# Altium PCB clock_led.PcbDoc (part 1 of 3)
Units mm, origin at the board's own origin, x right, y up, seen from the top; angles counter-clockwise.
Board outline 60 x 80 mm, 4 copper layers (TL, L2, L3, BL), stack 1.564 mm thick; 321 components, 72 nets, 902 pads, 698 vias.
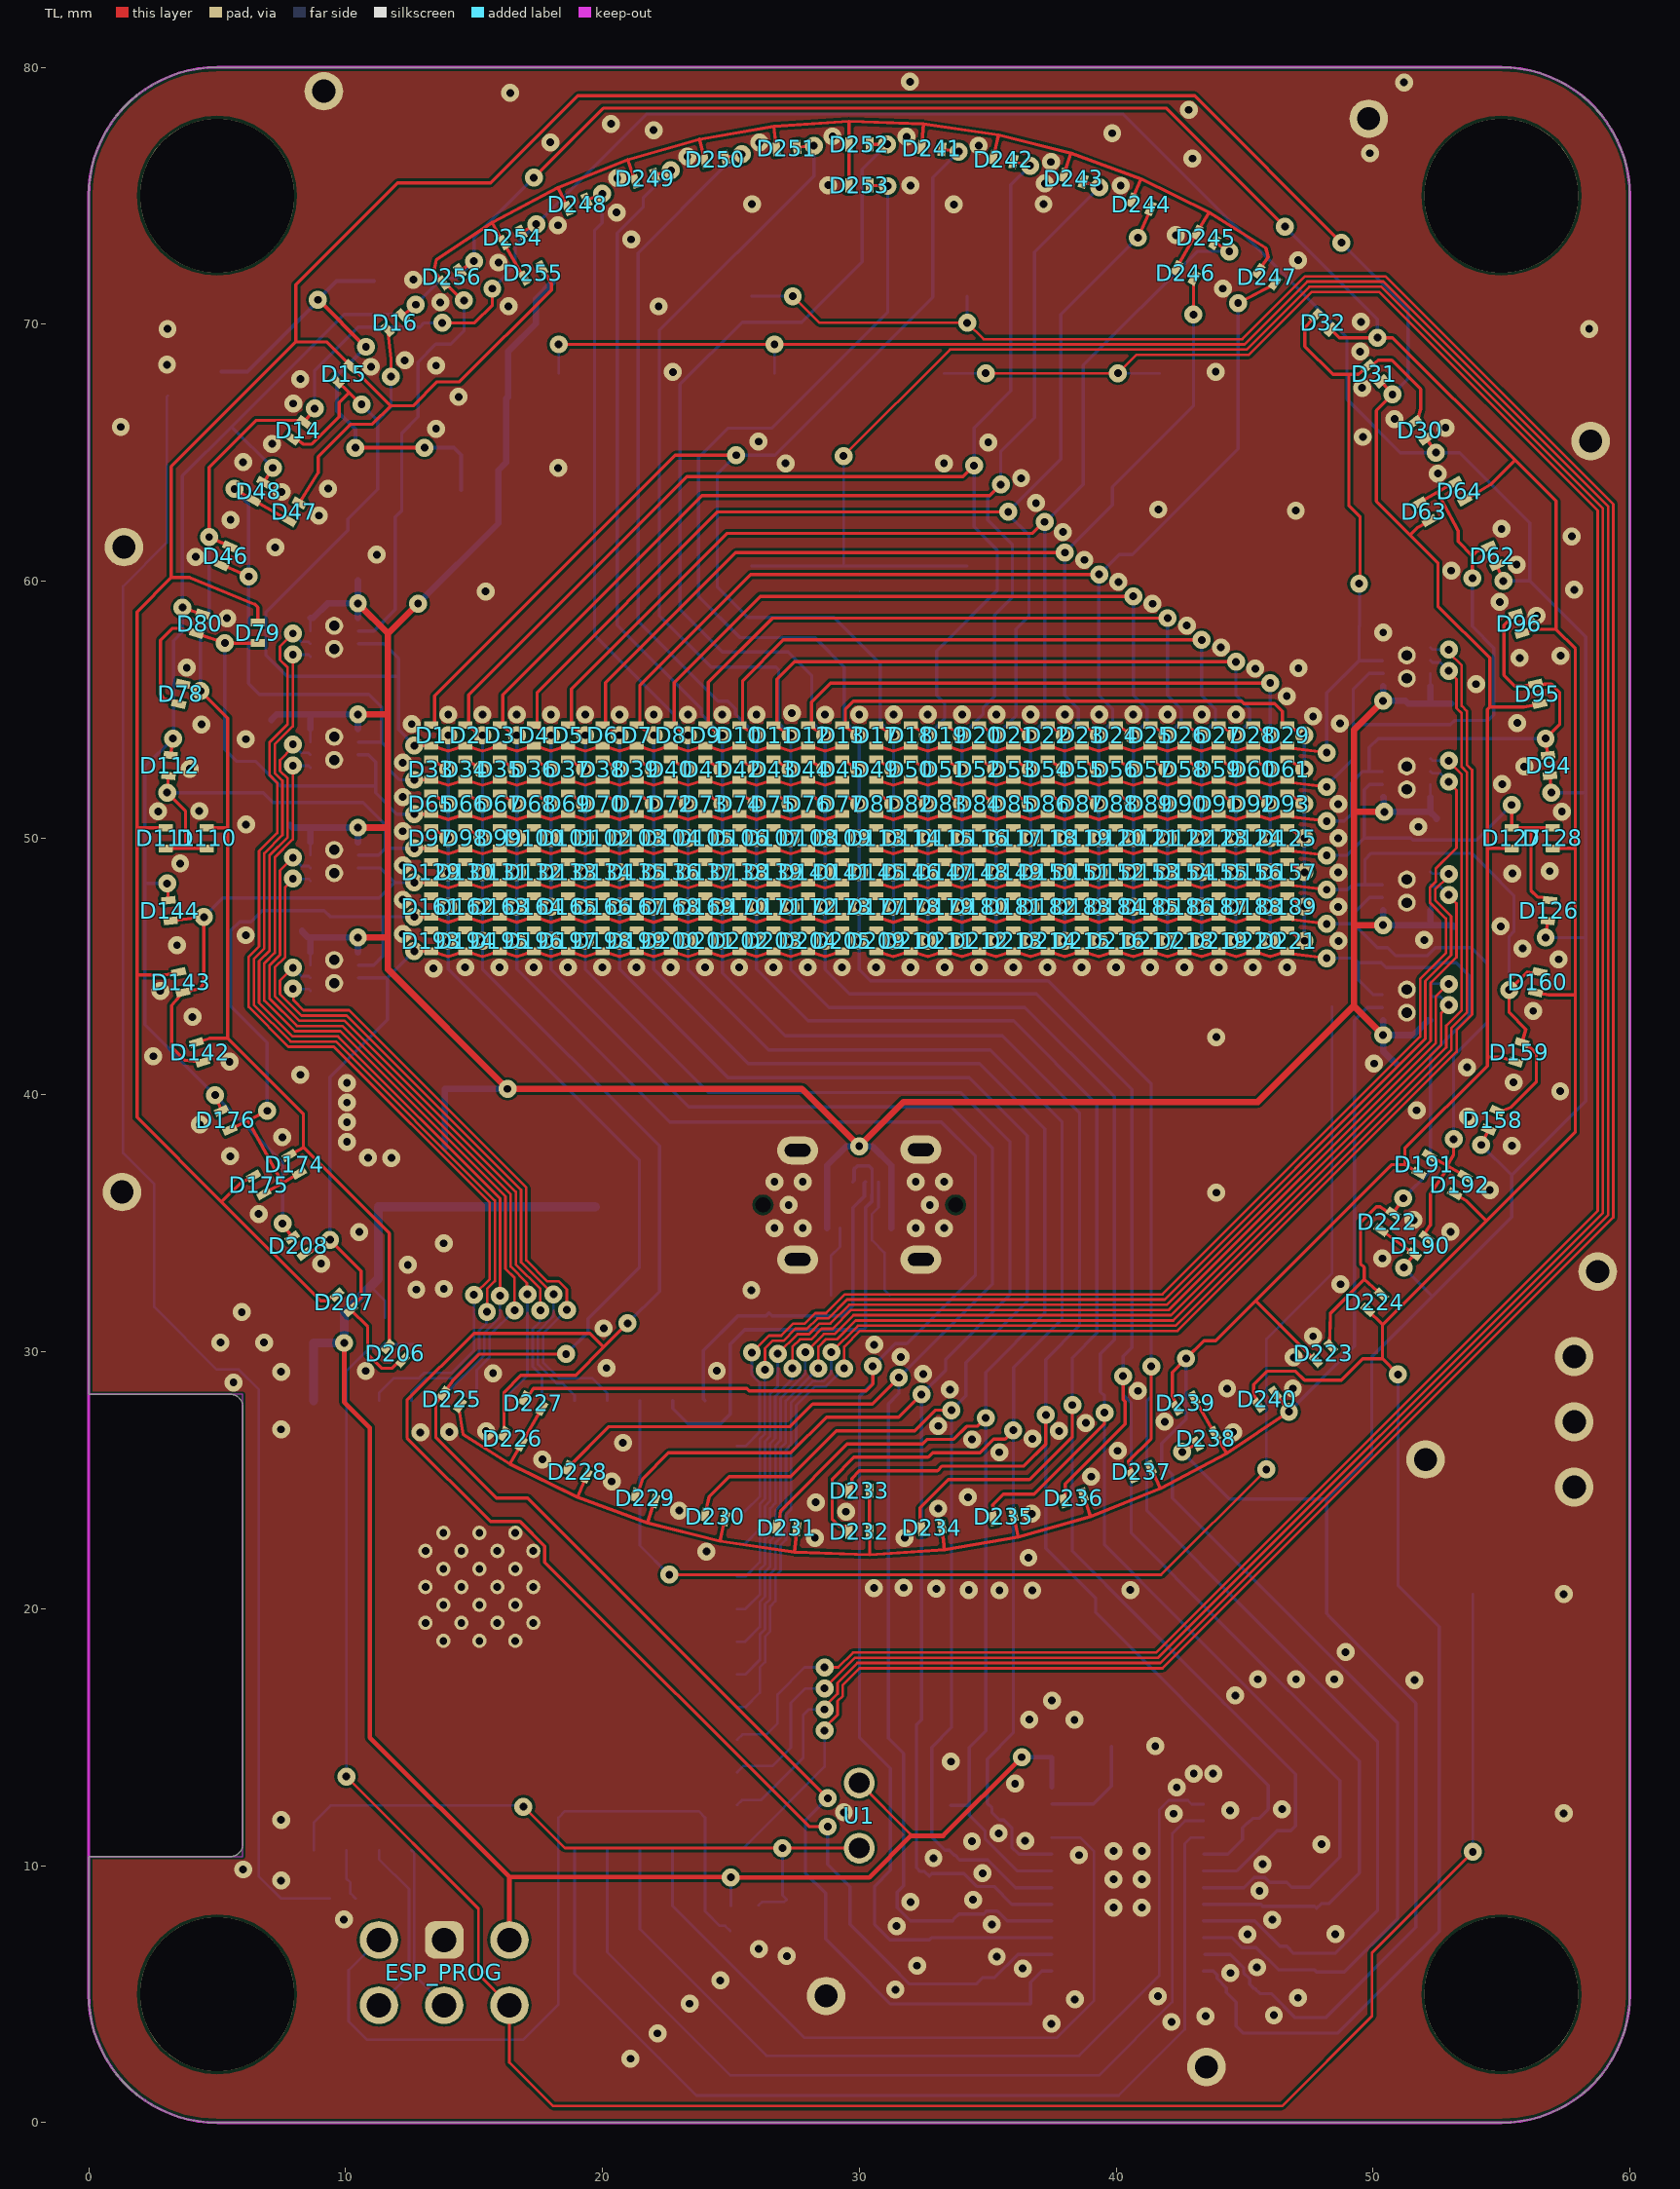
[diagram p0: TL view]
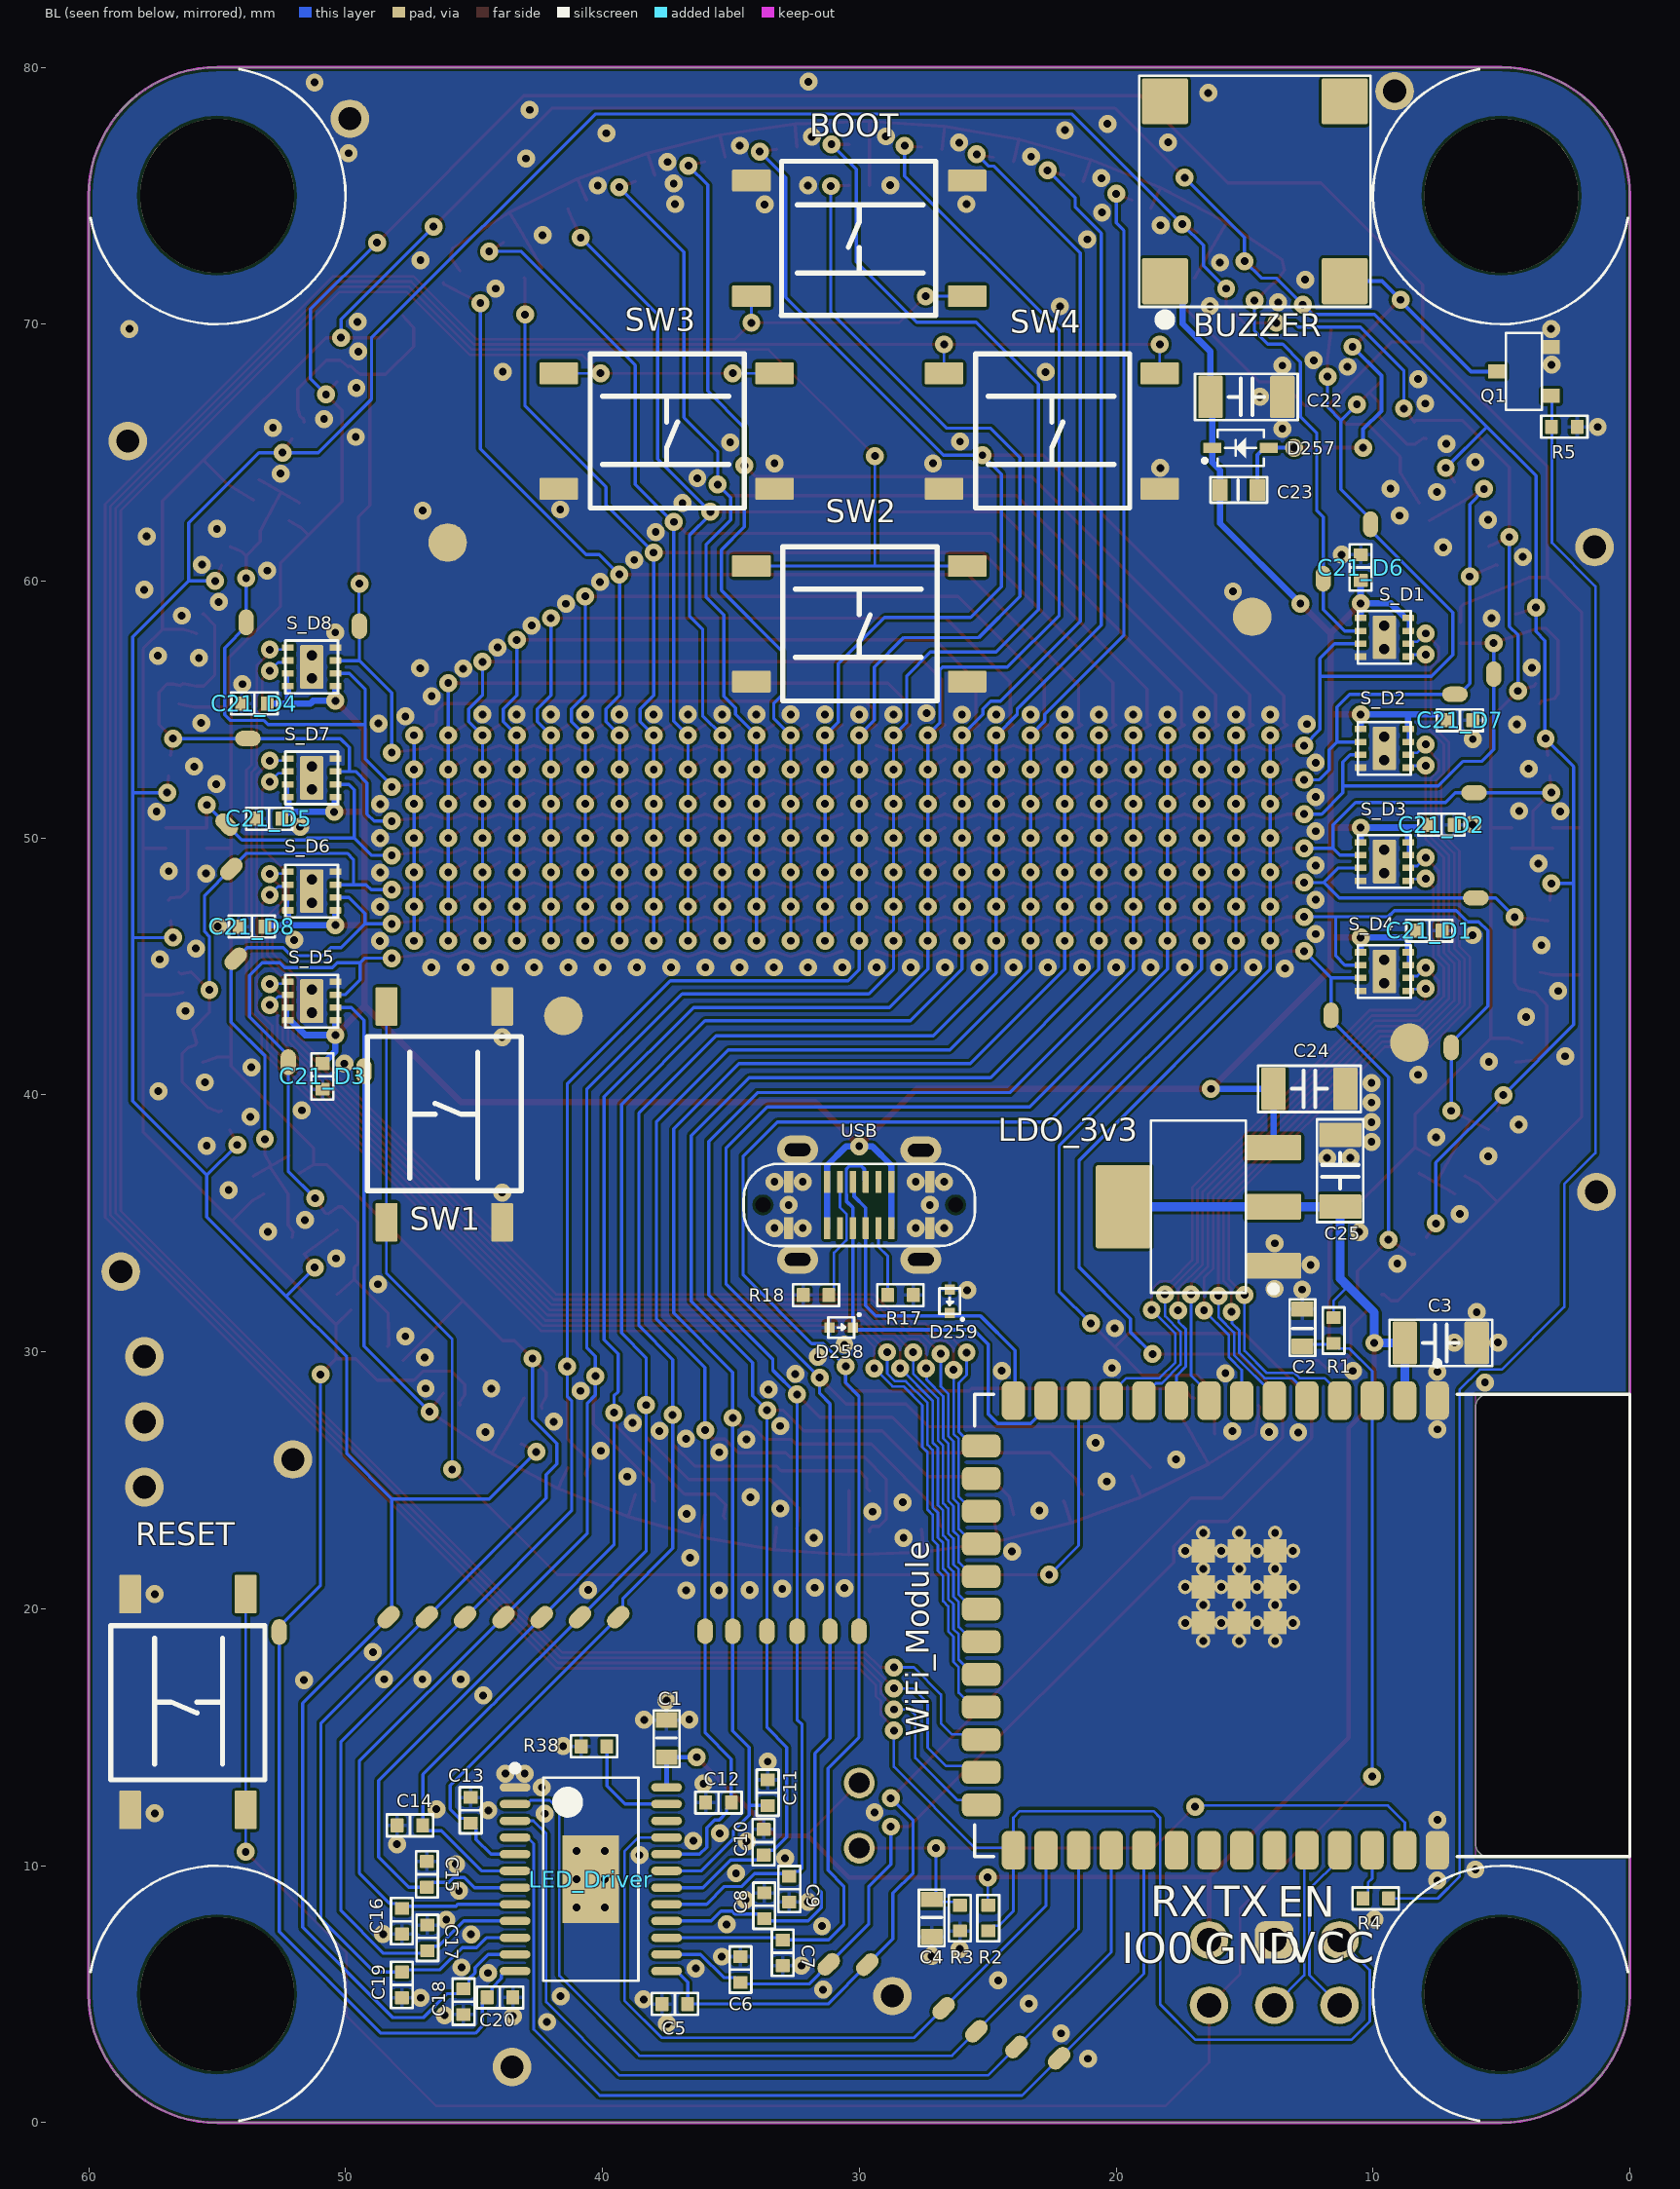
[diagram p1: BL view, seen from below]
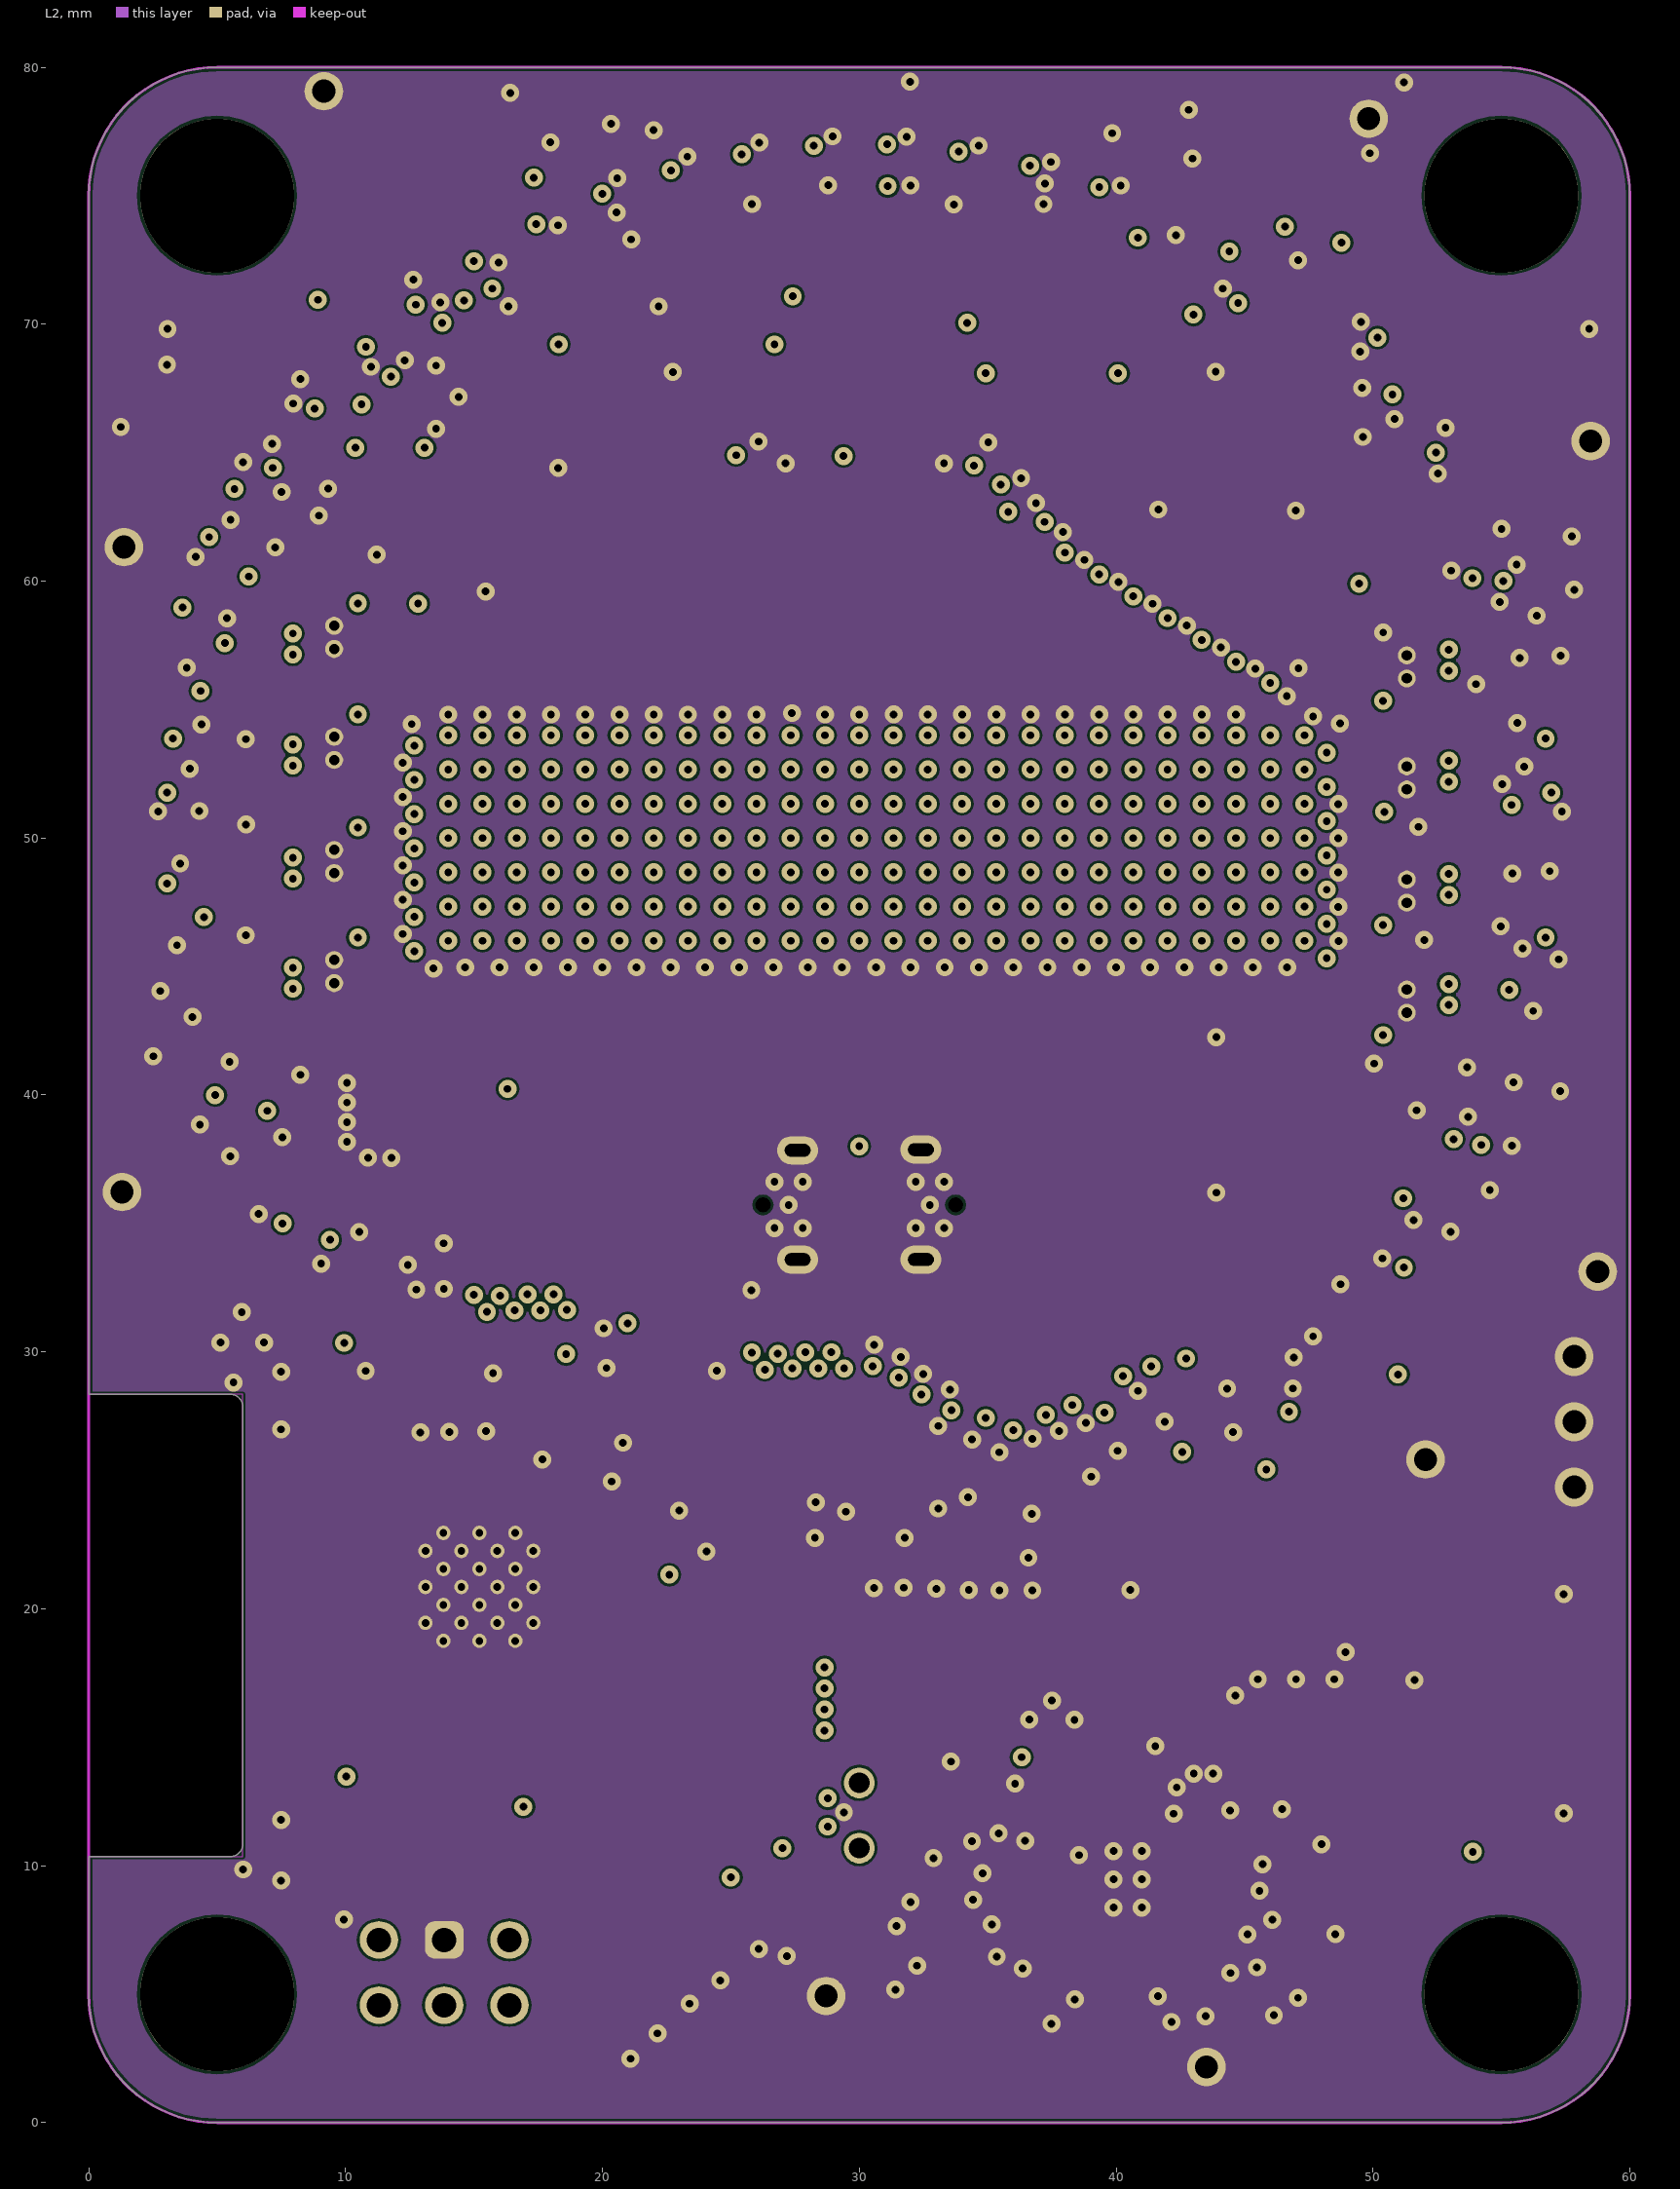
[diagram p2: L2]
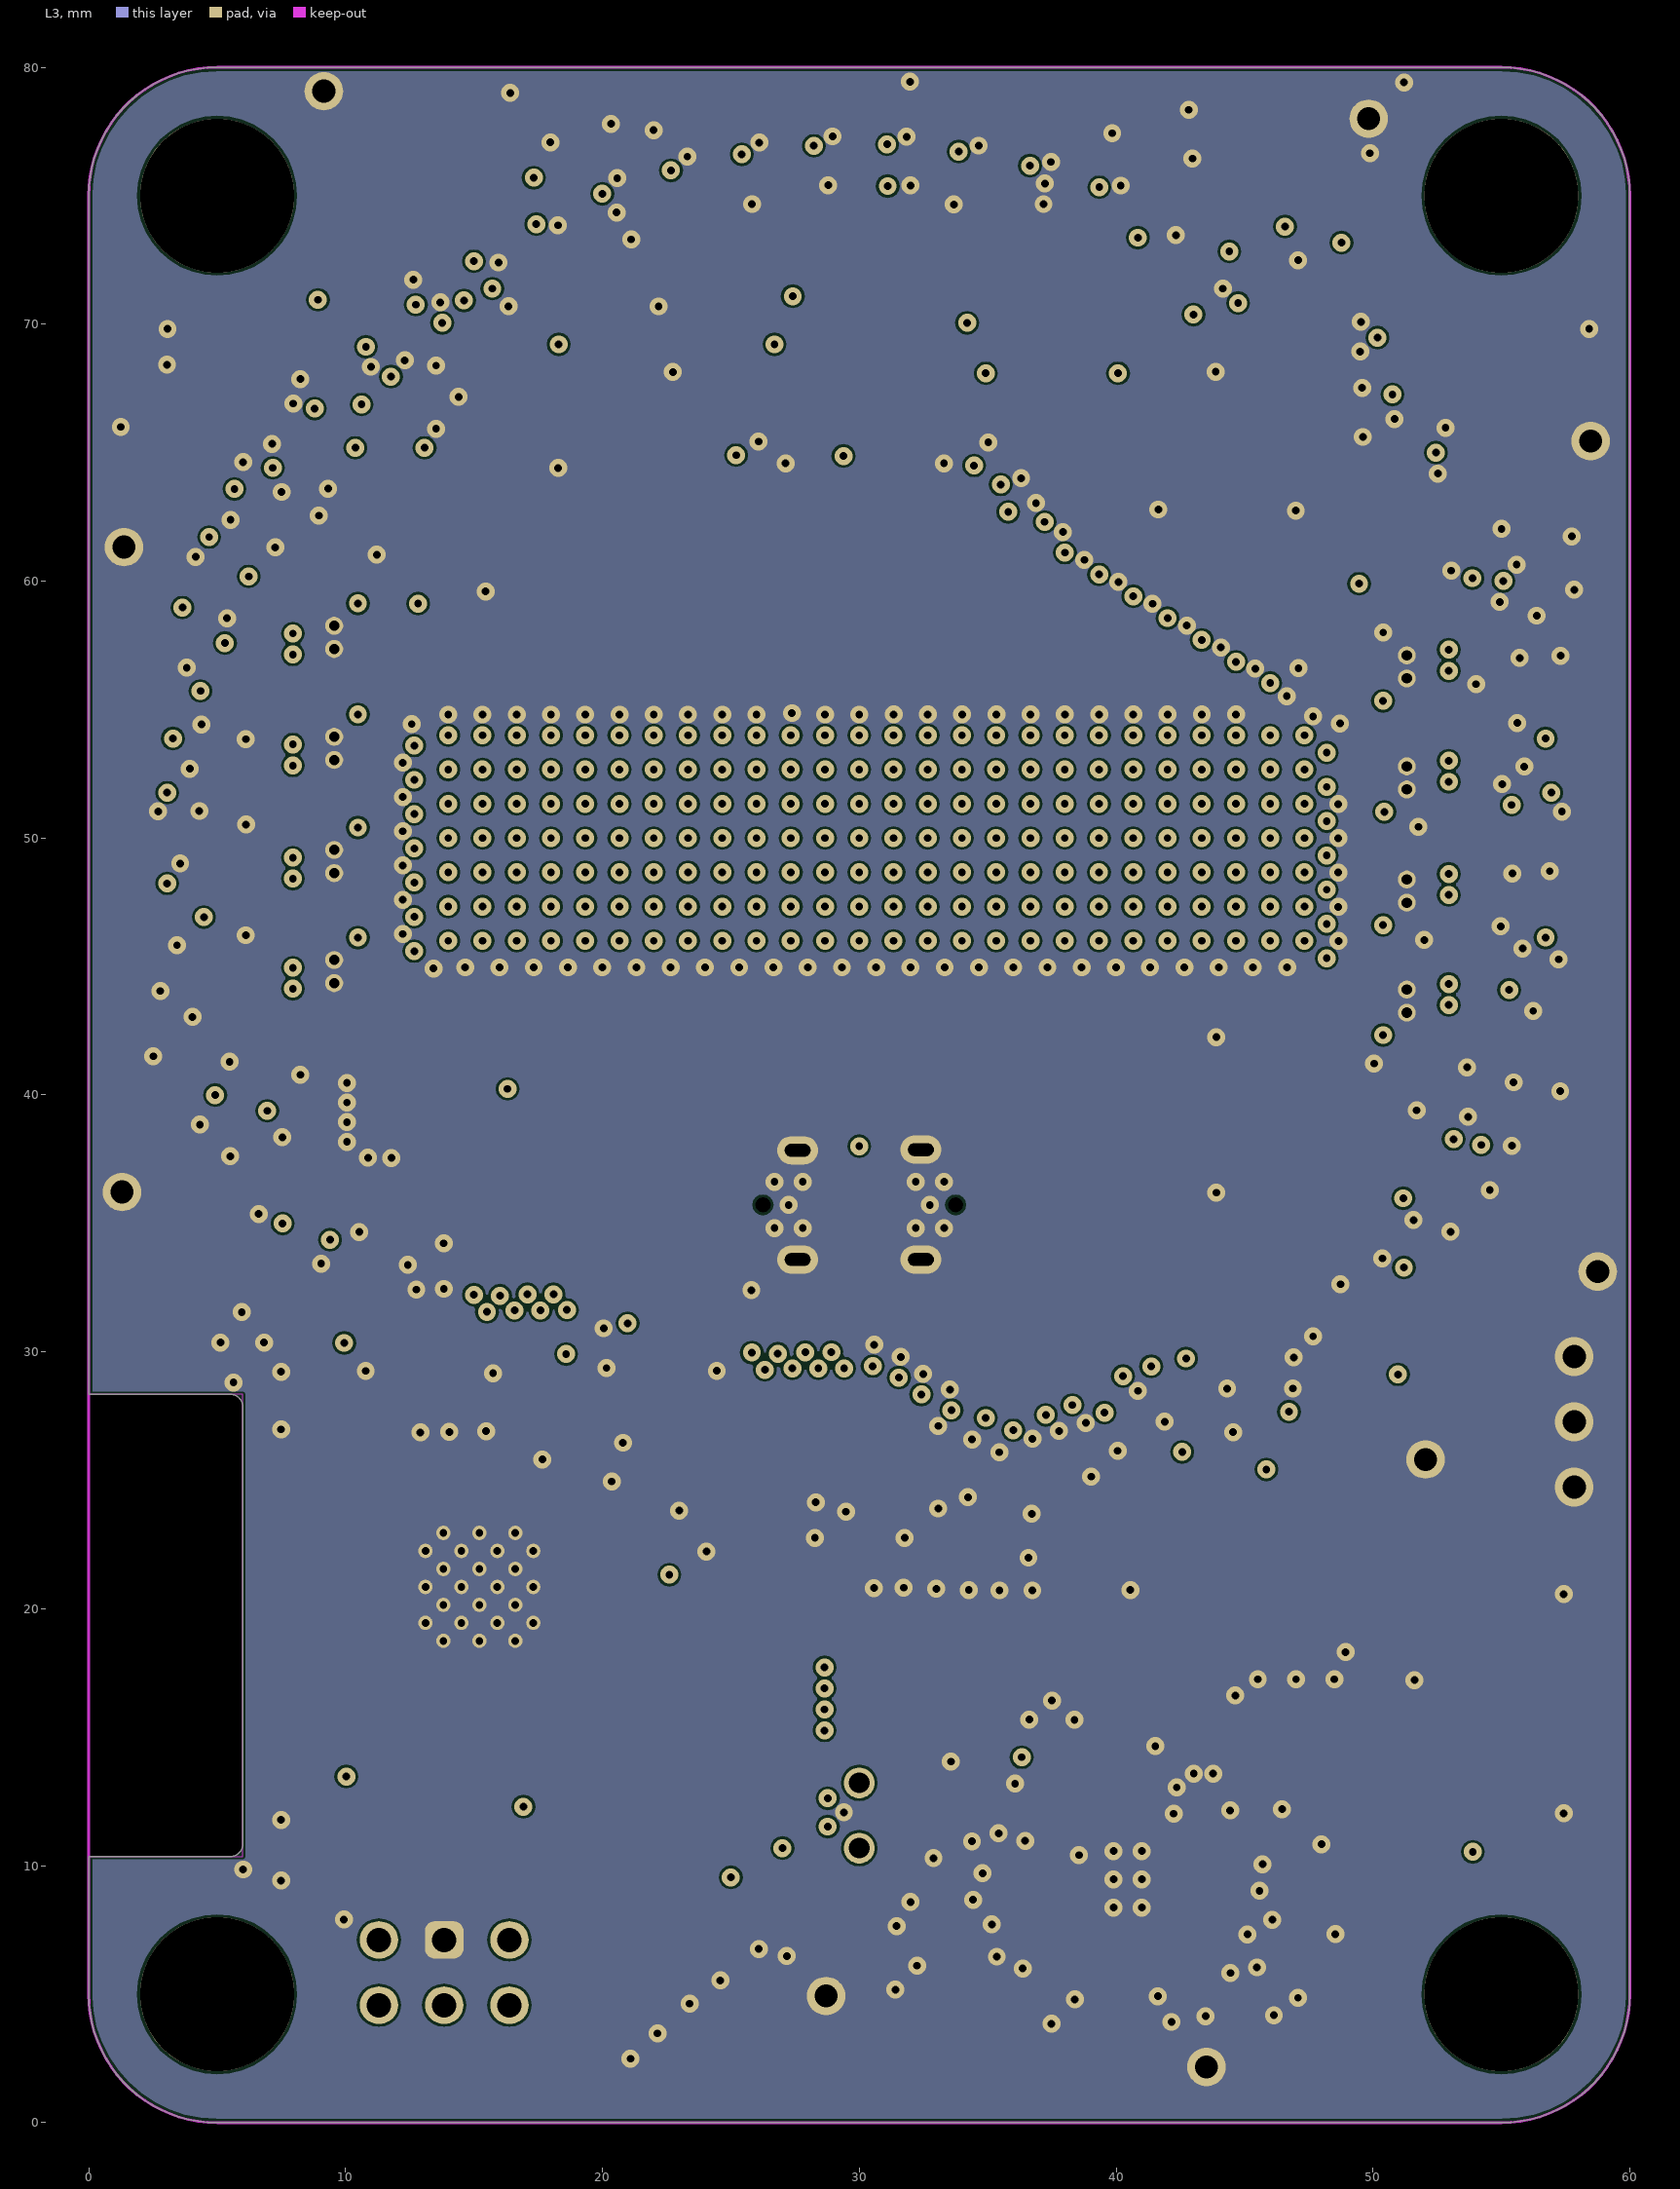
[diagram p3: L3]

## Layer stack, top to bottom
Top Solder: solder mask 0.0254, SM-001, Dk 4
TL: signal copper 0.035
Dielectric 1: prepreg 0.0994, PP-006, Dk 4.1
L2: signal copper 0.0152
Dielectric 2: core 1.265, Core-043, Dk 4.3
L3: signal copper 0.0152
Dielectric 3: prepreg 0.0994, PP-006, Dk 4.1
BL: signal copper 0.035
Bottom Solder: solder mask 0.0254, SM-001, Dk 4

## Board outline
0.001,5 0.001,10.355 5.502,10.355 ccw(c5.502,10.855) 6.002,10.855 6.001,10.854 6.001,27.855 ccw(c5.501,27.855) 5.501,28.355 0,28.355 0,75 cw(c5,75) 5,80 55,80 cw(c55,75) 60,75 60,5 cw(c55,5) 55,0 5,0.001 cw(c5,5)

## Design rules (kind name [scope] priority, off if disabled: settings)
Clearance Clearance_K [InNetClass('CATHODES') vs InNetClass('CATHODES')] p1: gap=0.102 ignorepadtopadclearanceinfootprint=FALSE except(0.395: Text-Hole)
Clearance [All] p2: gap=0.102 ignorepadtopadclearanceinfootprint=FALSE except(0.076: Arc-SMDPad Track-SMDPad)
ComponentClearance [All] p1: gap=0.125 collisioncheckmode=3 verticalgap=0.254 showdistances=TRUE
HoleSize [All] p1: absolutevalues=TRUE maxlimit=6 minlimit=0.025 maxpercent=80.000 minpercent=20.000
MinimumSolderMaskSliver [All] p1: minsoldermaskwidth=0.1
PolygonConnect PolygonConnect_Normal_1 [InNet('GND') vs HasFootprint('CAP_0402') OR HasFootprint('RES 0402_1005 RF') OR HasFootprint('CAPC_0603_1608X08L') OR HasFootprint('TVS_DIODE')] p1: connectstyle=Relief reliefconductorwidth=0.152 reliefentries=4 polygonreliefangle="90 Angle" airgapwidth=0.102
PolygonConnect PolygonConnect_GND [All] p2: connectstyle=Direct reliefconductorwidth=0.254 reliefentries=4 polygonreliefangle="90 Angle" airgapwidth=0.254
PolygonConnect PolygonConnect_Normal [All] p3: connectstyle=Relief reliefconductorwidth=0.254 reliefentries=4 polygonreliefangle="90 Angle" airgapwidth=0.254
RoutingVias [All] p1: holewidth=0.711 width=1.27 viastyle="Through Hole" minholewidth=0.711 minwidth=1.27 maxholewidth=0.711 maxwidth=1.27 useviatemplates=TRUE viatemplateguid#1={105B9890-E4DB-4CED-86C6-94DD6AE4ED00} viatemplateguid#2={BDFD0E13-A248-40EC-85C0-868C4552AEFA} viatemplateguid#3={A392A9DB-8C15-4CF2-995A-6831BDE9E32C} viatemplateguid#4={B74F54F6-0500-4321-A5F9-6BF2CA40FEDF} viatemplateguid#5={693162FA-0B77-47D4-AF39-BF49E954BDF3} viatemplatename#1=GND_VIA viatemplatename#2=LED_ROUTING viatemplatename#3=SW_ROUTING viatemplatename#4=S_ROUTING viatemplatename#5=TH_TEST_VIA
SilkToSilkClearance [All] p1: silktosilkclearance=0
SilkToSolderMaskClearance [False] p1: minsilkscreentomaskgap=0 clearancetoexposedcopper=TRUE
SolderMaskExpansion [All] p1: expansion=0.038 istentingtop=FALSE
SupplyNets "Schematic Supply Nets_2" [InNet('VCC')] p1: voltage=0.000
SupplyNets "Schematic Supply Nets_1" [InNet('+5')] p2: voltage=0.000
SupplyNets "Schematic Supply Nets" [InNet('GND')] p3: voltage=0.000
Width [All] p1: maxlimit=1 minlimit=0.076 preferedwidth=0.102 minimp=50.000000 maximp=50.000000 favimp=50.000000
25 further rules are at their usual default settings.

## Classes and differential pairs
net class N000-1_[0..15]: K0 K1 K2 K3 K4 K5 K6 K7 K8 K9 K10 K11 K12 K13 K14 K15
net class CATHODES: K0 K1 K2 K3 K4 K5 K6 K7 K8 K9 K10 K11 K12 K13 K14 K15
channel class clock_led_dual_switch: D1 D2 D3 D4 D5 D6 D7 D8
component class D1: C21_D1 S_D1
component class D2: C21_D2 S_D2
component class D3: C21_D3 S_D3
component class D4: C21_D4 S_D4
component class D5: C21_D5 S_D5
component class D6: C21_D6 S_D6
component class D7: C21_D7 S_D7
component class D8: C21_D8 S_D8
component class LED_MATRIX: D1 D2 D3 D4 D5 D6 D7 D8 D9 D10 D11 D12 D13 D17 D18 D19 D20 D21 D22 D23 D24 D25 D26 D27 D28 D29 D33 D34 D35 D36 D37 D38 D39 D40 D41 D42 D43 D44 D45 D49 D50 D51 D52 D53 D54 D55 D56 D57 D58 D59 D60 D61 D65 D66 D67 D68 D69 D70 D71 D72 D73 D74 D75 D76 D77 D81 D82 D83 D84 D85 D86 D87 D88 D89 D90 D91 D92 D93 D97 D98 D99 D100 D101 D102 D103 D104 D105 D106 D107 D108 D109 D113 D114 D115 D116 D117 D118 D119 D120 D121 D122 D123 D124 D125 D129 D130 D131 D132 D133 D134 D135 D136 D137 D138 D139 D140 D141 D145 D146 D147 D148 D149 D150 D151 D152 D153 D154 D155 D156 D157 D161 D162 D163 D164 D165 D166 D167 D168 D169 D170 D171 D172 D173 D177 D178 D179 D180 D181 D182 D183 D184 D185 D186 D187 D188 D189 D193 D194 D195 D196 D197 D198 D199 D200 D201 D202 D203 D204 D205 D209 D210 D211 D212 D213 D214 D215 D216 D217 D218 D219 D220 D221
component class clock_led: BOOT BUZZER C1 C2 C3 C4 C5 C6 C7 C8 C9 C10 C11 C12 C13 C14 C15 C16 C17 C18 C19 C20 C22 C23 C24 C25 D257 D258 D259 ESP_PROG LDO_3v3 LED_Driver Q1 R1 R2 R3 R4 R5 R17 R18 R38 RESET SW1 SW2 SW3 SW4 U1 USB WiFi_Module
net class N000-2_[0..15]: A0 A1 A2 A3 A4 A5 A6 A7 A8 A9 A10 A11 A12 A13 A14 A15
component class "CLOCK FACE": CONNECTOR D1 D2 D3 D4 D5 D6 D7 D8 D9 D10 D11 D12 D13 D14 D15 D16 D17 D18 D19 D20 D21 D22 D23 D24 D25 D26 D27 D28 D29 D30 D31 D32 D33 D34 D35 D36 D37 D38 D39 D40 D41 D42 D43 D44 D45 D46 D47 D48 D49 D50 D51 D52 D53 D54 D55 D56 D57 D58 D59 D60 D61 D62 D63 D64 D65 D66 D67 D68 D69 D70 D71 D72 D73 D74 D75 D76 D77 D78 D79 D80 D81 D82 D83 D84 D85 D86 D87 D88 D89 D90 D91 D92 D93 D94 D95 D96 D97 D98 D99 D100 D101 D102 D103 D104 D105 D106 D107 D108 D109 D110 D111 D112 D113 D114 D115 D116 D117 D118 D119 D120 D121 D122 D123 D124 D125 D126 D127 D128 D129 D130 D131 D132 D133 D134 D135 D136 D137 D138 D139 D140 D141 D142 D143 D144 D145 D146 D147 D148 D149 D150 D151 D152 D153 D154 D155 D156 D157 D158 D159 D160 D161 D162 D163 D164 D165 D166 D167 D168 D169 D170 D171 D172 D173 D174 D175 D176 D177 D178 D179 D180 D181 D182 D183 D184 D185 D186 D187 D188 D189 D190 D191 D192 D193 D194 D195 D196 D197 D198 D199 D200 D201 D202 D203 D204 D205 D206 D207 D208 D209 D210 D211 D212 D213 D214 D215 D216 D217 D218 D219 D220 D221 D222 D223 D224 D225 D226 D227 D228 D229 D230 D231 D232 D233 D234 D235 D236 D237 D238 D239 D240 D241 D242 D243 D244 D245 D246 D247 D248 D249 D250 D251 D252 D253 D254 D255 D256

## Components (designator, comment, footprint, x,y, rotation, side; value= is the part's Value field where it differs from the comment)
BOOT "SW-SMD_YZA-072-7.0" FSM-SWITCH-6X6X7.0 30,73.34 r0 bottom
BUZZER "BUZZER_MLT-7525" BUZZER_XHXDZ_SMD8530 14.6,75.175 r270 bottom
C1 "100nF" CAPC_0603_1608X08L 37.5,14.95 r270 bottom
C2 "100nF" CAPC_0603_1608X08L 12.744,30.943 r90 bottom
C3 "1uF" CAPC_1206_3216X16L 7.361,30.35 r180 bottom
C4 "100nF" CAPC_0603_1608X08L 27.178,7.965 r270 bottom
C5 "100pF" CAP_0402 37.178,4.623 r180 bottom
C6 "100pF" CAP_0402 34.624,5.963 r270 bottom
C7 "100pF" CAP_0402 32.979,6.613 r90 bottom
C8 "100pF" CAP_0402 33.7,8.444 r270 bottom
C9 "100pF" CAP_0402 32.725,9.092 r90 bottom
C10 "100pF" CAP_0402 33.725,10.917 r270 bottom
C11 "100pF" CAP_0402 33.563,12.845 r270 bottom
C12 "100pF" CAP_0402 35.481,12.459 r180 bottom
C13 "100pF" CAP_0402 45.129,12.16 r270 bottom
C14 "100pF" CAP_0402 47.491,11.573 r180 bottom
C15 "100pF" CAP_0402 46.831,9.667 r270 bottom
C16 "100pF" CAP_0402 47.806,7.842 r90 bottom
C17 "100pF" CAP_0402 46.813,7.194 r270 bottom
C18 "100pF" CAP_0402 45.407,4.709 r90 bottom
C19 "100pF" CAP_0402 47.806,5.363 r90 bottom
C20 "100pF" CAP_0402 43.987,4.877 r0 bottom
C21_D1 "100nF" CAP_0402 7.804,46.395 r180 bottom (schematic designator C21)
C21_D2 "100nF" CAP_0402 7.331,50.519 r180 bottom (schematic designator C21)
C21_D3 "100nF" CAP_0402 50.901,40.724 r270 bottom (schematic designator C21)
C21_D4 "100nF" CAP_0402 53.544,55.239 r0 bottom (schematic designator C21)
C21_D5 "100nF" CAP_0402 52.974,50.75 r0 bottom (schematic designator C21)
C21_D6 "100nF" CAP_0402 10.482,60.528 r90 bottom (schematic designator C21)
C21_D7 "100nF" CAP_0402 6.612,54.585 r180 bottom (schematic designator C21)
C21_D8 "100nF" CAP_0402 53.645,46.558 r0 bottom (schematic designator C21)
C22 "1uF" CAPC_1206_3216X16L 14.926,67.168 r180 bottom
C23 "100nF" CAPC_0603_1608X08L 15.225,63.55 r180 bottom
C24 "1uF" CAPC_1206_3216X16L 12.471,40.238 r0 bottom
C25 "1uF" CAPC_1206_3216X16L 11.276,37.051 r90 bottom
D1 "LED" LED_0402 13.334,54 r270 top
D2 "LED" LED_0402 14.667,54 r270 top
D3 "LED" LED_0402 16,54 r270 top
D4 "LED" LED_0402 17.334,54 r270 top
D5 "LED" LED_0402 18.667,54 r270 top
D6 "LED" LED_0402 20,54 r270 top
D7 "LED" LED_0402 21.334,54 r270 top
D8 "LED" LED_0402 22.667,54 r270 top
D9 "LED" LED_0402 24,54 r270 top
D10 "LED" LED_0402 25.333,54 r270 top
D11 "LED" LED_0402 26.667,54 r270 top
D12 "LED" LED_0402 28,54 r270 top
D13 "LED" LED_0402 29.333,54 r270 top
D14 "LED" LED_0402 8.157,65.87 r234 top
D15 "LED" LED_0402 9.935,68.067 r228 top
D16 "LED" LED_0402 11.933,70.065 r222 top
D17 "LED" LED_0402 30.667,54 r270 top
D18 "LED" LED_0402 32,54 r270 top
D19 "LED" LED_0402 33.333,54 r270 top
D20 "LED" LED_0402 34.667,54 r270 top
D21 "LED" LED_0402 36,54 r270 top
D22 "LED" LED_0402 37.333,54 r270 top
D23 "LED" LED_0402 38.666,54 r270 top
D24 "LED" LED_0402 40,54 r270 top
D25 "LED" LED_0402 41.333,54 r270 top
D26 "LED" LED_0402 42.666,54 r270 top
D27 "LED" LED_0402 44,54 r270 top
D28 "LED" LED_0402 45.333,54 r270 top
D29 "LED" LED_0402 46.666,54 r270 top
D30 "LED" LED_0402 51.843,65.87 r126 top
D31 "LED" LED_0402 50.065,68.067 r132 top
D32 "LED" LED_0402 48.067,70.065 r138 top
D33 "LED" LED_0402 13.334,52.667 r270 top
D34 "LED" LED_0402 14.667,52.667 r270 top
D35 "LED" LED_0402 16,52.667 r270 top
D36 "LED" LED_0402 17.334,52.667 r270 top
D37 "LED" LED_0402 18.667,52.667 r270 top
D38 "LED" LED_0402 20,52.667 r270 top
D39 "LED" LED_0402 21.334,52.667 r270 top
D40 "LED" LED_0402 22.667,52.667 r270 top
D41 "LED" LED_0402 24,52.667 r270 top
D42 "LED" LED_0402 25.333,52.667 r270 top
D43 "LED" LED_0402 26.667,52.667 r270 top
D44 "LED" LED_0402 28,52.667 r270 top
D45 "LED" LED_0402 29.333,52.667 r270 top
D46 "LED" LED_0402 5.334,60.982 r246 top
D47 "LED" LED_0402 8.003,62.7 r240 top
D48 "LED" LED_0402 6.617,63.5 r240 top
D49 "LED" LED_0402 30.667,52.667 r270 top
D50 "LED" LED_0402 32,52.667 r270 top
D51 "LED" LED_0402 33.333,52.667 r270 top
D52 "LED" LED_0402 34.667,52.667 r270 top
D53 "LED" LED_0402 36,52.667 r270 top
D54 "LED" LED_0402 37.333,52.667 r270 top
D55 "LED" LED_0402 38.666,52.667 r270 top
D56 "LED" LED_0402 40,52.667 r270 top
D57 "LED" LED_0402 41.333,52.667 r270 top
D58 "LED" LED_0402 42.666,52.667 r270 top
D59 "LED" LED_0402 44,52.667 r270 top
D60 "LED" LED_0402 45.333,52.667 r270 top
D61 "LED" LED_0402 46.666,52.667 r270 top
D62 "LED" LED_0402 54.666,60.982 r114 top
D63 "LED" LED_0402 51.997,62.7 r120 top
D64 "LED" LED_0402 53.383,63.5 r120 top
D65 "LED" LED_0402 13.334,51.333 r270 top
D66 "LED" LED_0402 14.667,51.333 r270 top
D67 "LED" LED_0402 16,51.333 r270 top
D68 "LED" LED_0402 17.334,51.333 r270 top
D69 "LED" LED_0402 18.667,51.333 r270 top
D70 "LED" LED_0402 20,51.333 r270 top
D71 "LED" LED_0402 21.334,51.333 r270 top
D72 "LED" LED_0402 22.667,51.333 r270 top
D73 "LED" LED_0402 24,51.333 r270 top
D74 "LED" LED_0402 25.333,51.333 r270 top
D75 "LED" LED_0402 26.667,51.333 r270 top
D76 "LED" LED_0402 28,51.333 r270 top
D77 "LED" LED_0402 29.333,51.333 r270 top
D78 "LED" LED_0402 3.59,55.614 r258 top
D79 "LED" LED_0402 6.589,57.99 r270 top
D80 "LED" LED_0402 4.321,58.343 r252 top
D81 "LED" LED_0402 30.667,51.333 r270 top
D82 "LED" LED_0402 32,51.333 r270 top
D83 "LED" LED_0402 33.333,51.333 r270 top
D84 "LED" LED_0402 34.667,51.333 r270 top
D85 "LED" LED_0402 36,51.333 r270 top
D86 "LED" LED_0402 37.333,51.333 r270 top
D87 "LED" LED_0402 38.666,51.333 r270 top
D88 "LED" LED_0402 40,51.333 r270 top
D89 "LED" LED_0402 41.333,51.333 r270 top
D90 "LED" LED_0402 42.666,51.333 r270 top
D91 "LED" LED_0402 44,51.333 r270 top
D92 "LED" LED_0402 45.333,51.333 r270 top
D93 "LED" LED_0402 46.666,51.333 r270 top
D94 "LED" LED_0402 56.852,52.822 r96 top
D95 "LED" LED_0402 56.41,55.614 r102 top
D96 "LED" LED_0402 55.679,58.343 r108 top
D97 "LED" LED_0402 13.334,50 r270 top
D98 "LED" LED_0402 14.667,50 r270 top
D99 "LED" LED_0402 16,50 r270 top
D100 "LED" LED_0402 17.334,50 r270 top
D101 "LED" LED_0402 18.667,50 r270 top
D102 "LED" LED_0402 20,50 r270 top
D103 "LED" LED_0402 21.334,50 r270 top
D104 "LED" LED_0402 22.667,50 r270 top
D105 "LED" LED_0402 24,50 r270 top
D106 "LED" LED_0402 25.333,50 r270 top
D107 "LED" LED_0402 26.667,50 r270 top
D108 "LED" LED_0402 28,50 r270 top
D109 "LED" LED_0402 29.333,50 r270 top
D110 "LED" LED_0402 4.6,50 r270 top
D111 "LED" LED_0402 3,50 r270 top
D112 "LED" LED_0402 3.148,52.822 r264 top
D113 "LED" LED_0402 30.667,50 r270 top
D114 "LED" LED_0402 32,50 r270 top
D115 "LED" LED_0402 33.333,50 r270 top
D116 "LED" LED_0402 34.667,50 r270 top
D117 "LED" LED_0402 36,50 r270 top
D118 "LED" LED_0402 37.333,50 r270 top
D119 "LED" LED_0402 38.666,50 r270 top
D120 "LED" LED_0402 40,50 r270 top
D121 "LED" LED_0402 41.333,50 r270 top
D122 "LED" LED_0402 42.666,50 r270 top
D123 "LED" LED_0402 44,50 r270 top
D124 "LED" LED_0402 45.333,50 r270 top
D125 "LED" LED_0402 46.666,50 r270 top
D126 "LED" LED_0402 56.852,47.178 r84 top
D127 "LED" LED_0402 55.4,50 r90 top
D128 "LED" LED_0402 57,50 r90 top
D129 "LED" LED_0402 13.334,48.667 r270 top
D130 "LED" LED_0402 14.667,48.667 r270 top
D131 "LED" LED_0402 16,48.667 r270 top
D132 "LED" LED_0402 17.334,48.667 r270 top
D133 "LED" LED_0402 18.667,48.667 r270 top
D134 "LED" LED_0402 20,48.667 r270 top
D135 "LED" LED_0402 21.334,48.667 r270 top
D136 "LED" LED_0402 22.667,48.667 r270 top
D137 "LED" LED_0402 24,48.667 r270 top
D138 "LED" LED_0402 25.333,48.667 r270 top
D139 "LED" LED_0402 26.667,48.667 r270 top
D140 "LED" LED_0402 28,48.667 r270 top
D141 "LED" LED_0402 29.333,48.667 r270 top
D142 "LED" LED_0402 4.321,41.657 r288 top
D143 "LED" LED_0402 3.59,44.386 r282 top
D144 "LED" LED_0402 3.148,47.178 r276 top
D145 "LED" LED_0402 30.667,48.667 r270 top
D146 "LED" LED_0402 32,48.667 r270 top
D147 "LED" LED_0402 33.333,48.667 r270 top
D148 "LED" LED_0402 34.667,48.667 r270 top
D149 "LED" LED_0402 36,48.667 r270 top
D150 "LED" LED_0402 37.333,48.667 r270 top
D151 "LED" LED_0402 38.666,48.667 r270 top
D152 "LED" LED_0402 40,48.667 r270 top
D153 "LED" LED_0402 41.333,48.667 r270 top
D154 "LED" LED_0402 42.666,48.667 r270 top
D155 "LED" LED_0402 44,48.667 r270 top
D156 "LED" LED_0402 45.333,48.667 r270 top
D157 "LED" LED_0402 46.666,48.667 r270 top
D158 "LED" LED_0402 54.666,39.018 r66 top
D159 "LED" LED_0402 55.679,41.657 r72 top
D160 "LED" LED_0402 56.41,44.386 r78 top
D161 "LED" LED_0402 13.334,47.333 r270 top
D162 "LED" LED_0402 14.667,47.333 r270 top
D163 "LED" LED_0402 16,47.333 r270 top
D164 "LED" LED_0402 17.334,47.333 r270 top
D165 "LED" LED_0402 18.667,47.333 r270 top
D166 "LED" LED_0402 20,47.333 r270 top
D167 "LED" LED_0402 21.334,47.333 r270 top
D168 "LED" LED_0402 22.667,47.333 r270 top
D169 "LED" LED_0402 24,47.333 r270 top
D170 "LED" LED_0402 25.333,47.333 r270 top
D171 "LED" LED_0402 26.667,47.333 r270 top
D172 "LED" LED_0402 28,47.333 r270 top
D173 "LED" LED_0402 29.333,47.333 r270 top
D174 "LED" LED_0402 8.003,37.3 r300 top
D175 "LED" LED_0402 6.617,36.5 r300 top
D176 "LED" LED_0402 5.334,39.018 r294 top
D177 "LED" LED_0402 30.667,47.333 r270 top
D178 "LED" LED_0402 32,47.333 r270 top
D179 "LED" LED_0402 33.333,47.333 r270 top
D180 "LED" LED_0402 34.667,47.333 r270 top
D181 "LED" LED_0402 36,47.333 r270 top
D182 "LED" LED_0402 37.333,47.333 r270 top
D183 "LED" LED_0402 38.666,47.333 r270 top
D184 "LED" LED_0402 40,47.333 r270 top
D185 "LED" LED_0402 41.333,47.333 r270 top
D186 "LED" LED_0402 42.666,47.333 r270 top
D187 "LED" LED_0402 44,47.333 r270 top
D188 "LED" LED_0402 45.333,47.333 r270 top
D189 "LED" LED_0402 46.666,47.333 r270 top
D190 "LED" LED_0402 51.843,34.13 r54 top
D191 "LED" LED_0402 51.997,37.3 r60 top
D192 "LED" LED_0402 53.383,36.5 r60 top
D193 "LED" LED_0402 13.334,46 r270 top
D194 "LED" LED_0402 14.667,46 r270 top
D195 "LED" LED_0402 16,46 r270 top
D196 "LED" LED_0402 17.334,46 r270 top
D197 "LED" LED_0402 18.667,46 r270 top
D198 "LED" LED_0402 20,46 r270 top
D199 "LED" LED_0402 21.334,46 r270 top
D200 "LED" LED_0402 22.667,46 r270 top
D201 "LED" LED_0402 24,46 r270 top
D202 "LED" LED_0402 25.333,46 r270 top
D203 "LED" LED_0402 26.667,46 r270 top
D204 "LED" LED_0402 28,46 r270 top
D205 "LED" LED_0402 29.333,46 r270 top
D206 "LED" LED_0402 11.933,29.935 r318 top
D207 "LED" LED_0402 9.935,31.933 r312 top
D208 "LED" LED_0402 8.157,34.13 r306 top
D209 "LED" LED_0402 30.667,46 r270 top
D210 "LED" LED_0402 32,46 r270 top
D211 "LED" LED_0402 33.333,46 r270 top
D212 "LED" LED_0402 34.667,46 r270 top
D213 "LED" LED_0402 36,46 r270 top
D214 "LED" LED_0402 37.333,46 r270 top
D215 "LED" LED_0402 38.666,46 r270 top
D216 "LED" LED_0402 40,46 r270 top
D217 "LED" LED_0402 41.333,46 r270 top
D218 "LED" LED_0402 42.666,46 r270 top
D219 "LED" LED_0402 44,46 r270 top
D220 "LED" LED_0402 45.333,46 r270 top
D221 "LED" LED_0402 46.666,46 r270 top
D222 "LED" LED_0402 50.549,35.07 r54 top
D223 "LED" LED_0402 48.067,29.935 r42 top
D224 "LED" LED_0402 50.065,31.933 r48 top
D225 "LED" LED_0402 14.13,28.157 r324 top
D226 "LED" LED_0402 16.5,26.617 r330 top
D227 "LED" LED_0402 17.3,28.003 r330 top
D228 "LED" LED_0402 19.018,25.334 r336 top
D229 "LED" LED_0402 21.657,24.321 r342 top
D230 "LED" LED_0402 24.386,23.59 r348 top
D231 "LED" LED_0402 27.178,23.148 r354 top
D232 "LED" LED_0402 30,23 r0 top
D233 "LED" LED_0402 30,24.6 r0 top
D234 "LED" LED_0402 32.822,23.148 r6 top
D235 "LED" LED_0402 35.614,23.59 r12 top
D236 "LED" LED_0402 38.343,24.321 r18 top
D237 "LED" LED_0402 40.982,25.334 r24 top
D238 "LED" LED_0402 43.5,26.617 r30 top
D239 "LED" LED_0402 42.7,28.003 r30 top
D240 "LED" LED_0402 45.87,28.157 r36 top
D241 "LED" LED_0402 32.822,76.852 r174 top
D242 "LED" LED_0402 35.614,76.41 r168 top
D243 "LED" LED_0402 38.343,75.679 r162 top
D244 "LED" LED_0402 40.982,74.666 r156 top
D245 "LED" LED_0402 43.5,73.383 r150 top
D246 "LED" LED_0402 42.7,71.997 r150 top
D247 "LED" LED_0402 45.87,71.843 r144 top
D248 "LED" LED_0402 19.018,74.666 r204 top
D249 "LED" LED_0402 21.657,75.679 r198 top
D250 "LED" LED_0402 24.386,76.41 r192 top
D251 "LED" LED_0402 27.178,76.852 r186 top
D252 "LED" LED_0402 30,77 r180 top
D253 "LED" LED_0402 30,75.4 r180 top
D254 "LED" LED_0402 16.5,73.383 r210 top
D255 "LED" LED_0402 17.3,71.997 r210 top
D256 "LED" LED_0402 14.13,71.843 r216 top
D257 "BAT54WS" SODFL250X100-2L 15.151,65.188 r0 bottom
D258 "TVS_DIODE" TVS_DIODE 30.7,30.95 r180 bottom
D259 "TVS_DIODE" TVS_DIODE 26.482,31.971 r270 bottom
ESP_PROG "ESP_PROG" ESP_PROG 13.841,5.85 r0 top
LDO_3v3 "AMS1117-3.3" SOT223_LDO 16.796,35.651 r0 bottom
LED_Driver "TLC5948A" TSSOP24 40.45,9.475 r270 bottom
Q1 "BSS138" SOT95P230X110-3L 4.125,68.161 r0 bottom
R1 "22k" "RES 0402_1005 RF" 11.532,30.831 r270 bottom
R2 "22k" "RES 0402_1005 RF" 24.976,7.965 r270 bottom
R3 "68k" "RES 0402_1005 RF" 26.083,7.965 r270 bottom
R4 "1.5k" "RES 0402_1005 RF" 9.891,8.728 r0 bottom
R5 "22k" "RES 0402_1005 RF" 2.547,66.009 r180 bottom
R17 "5.1k" "RES 0402_1005 RF" 28.394,32.21 r180 bottom
R18 "5.1k" "RES 0402_1005 RF" 31.684,32.21 r0 bottom
R38 "1.5k" "RES 0402_1005 RF" 40.325,14.65 r0 bottom
RESET "SW-SMD_YZA-072-5.5" FSM-SWITCH-6X6X5.5 56.137,16.372 r270 bottom
S_D1 "DRV8837DSGR-JSM" DFN-8-2X2-TP 9.557,57.812 r270 bottom (schematic designator S)
S_D2 "DRV8837DSGR-JSM" DFN-8-2X2-TP 9.557,53.492 r270 bottom (schematic designator S)
S_D3 "DRV8837DSGR-JSM" DFN-8-2X2-TP 9.557,49.087 r270 bottom (schematic designator S)
S_D4 "DRV8837DSGR-JSM" DFN-8-2X2-TP 9.557,44.804 r270 bottom (schematic designator S)
S_D5 "DRV8837DSGR-JSM" DFN-8-2X2-TP 51.318,43.653 r90 bottom (schematic designator S)
S_D6 "DRV8837DSGR-JSM" DFN-8-2X2-TP 51.318,47.936 r90 bottom (schematic designator S)
S_D7 "DRV8837DSGR-JSM" DFN-8-2X2-TP 51.318,52.341 r90 bottom (schematic designator S)
S_D8 "DRV8837DSGR-JSM" DFN-8-2X2-TP 51.318,56.661 r90 bottom (schematic designator S)
SW1 "SW-SMD_YZA-072-7.0" FSM-SWITCH-6X6X7.0 46.153,39.247 r90 bottom
SW2 "SW-SMD_YZA-072-7.0" FSM-SWITCH-6X6X7.0 30,58.34 r180 bottom
SW3 "SW-SMD_YZA-072-7.0" FSM-SWITCH-6X6X7.0 37.5,65.84 r180 bottom
SW4 "SW-SMD_YZA-072-7.0" FSM-SWITCH-6X6X7.0 22.5,65.84 r180 bottom
U1 "ALS-PT243-3C/L177" ALS-PT243-3C 30,11.958 r90 top
USB "GT-USB-7055BB" USB-C-TH_GT-USB-7055BB 30,35.722 r180 bottom
WiFi_Module "ESP32-S3-WROOM-1-N4" XCVR_ESP32-S3-WROOM-1-N16R2 12.751,19.355 r270 bottom

## Footprints (in the part's own frame and the unit in brackets; to place one, negate y for a bottom-side part, rotate by r counter-clockwise, add the part's x,y. Pads: shape width x height; smd on the part's side, far side on the other; paste and mask are expansions set on the pad)
ALS-PT243-3C [mm] "ALS-PT243-3C/L177"
  round 1.2 hole 0.8 paste-2539.97 mask+0: C(1.27,0) E(-1.27,0)
  body extent -2.5,-2.5 2.5,2.5, height 3.2
BUZZER_XHXDZ_SMD8530 [mm]
  rrect10% 1.8x1.8 smd paste-2539.97 mask+0: 1(3.5,-3.5) 2(3.5,3.5) 3(-3.5,3.5) 4(-3.5,-3.5)
  silkscreen extent -4.5,-4.5 5.2,4.5, body extent -4.25,-4.25 4.25,4.26, height 3.01
CAP_0402 [mm] "Chip Capacitor, 2-Leads, Body 1.00x0.50mm, IPC Medium Density"
  rrect10% 0.5x0.55 smd: 1(-0.5,0) 2(0.5,0)
  silkscreen extent -0.9,-0.42 0.9,0.43, body extent -0.52,-0.28 0.53,0.28, height 0.5
CAPC_0603_1608X08L [mm] "Chip Capacitor 0603"
  rrect10% 0.6x0.85 smd: 1(-0.725,0) 2(0.725,0)
  silkscreen extent -1.1,-0.5 1.1,0.5, body extent -0.8,-0.4 0.8,0.4, height 0.8
CAPC_1206_3216X16L [mm] "Chip Capacitor 1206"
  rrect10% 0.95x1.65 smd: 1(-1.4,0) 2(1.4,0)
  silkscreen extent -2,-0.9 2,0.9, body extent -1.6,-0.8 1.6,0.8, height 1.6
DFN-8-2X2-TP [mm]
  rrect10% 0.25x0.45 smd paste-2539.97 mask+0: 1(-0.75,-0.925) 2(-0.25,-0.925) 3(0.25,-0.925) 4(0.75,-0.925) 5(0.75,0.925) 6(0.25,0.925) 7(-0.25,0.925) 8(-0.75,0.925)
  round 0.7 hole 0.4 paste-2539.97 mask+0: 4(-0.45,0) 4(0.45,0)
  rrect10% 1.7x0.9 smd mask+0: 4(0,0)
  silkscreen extent -1.02,-1.02 1.02,1.02, body extent -0.99,-1 0.99,1, height 0.55
ESP_PROG [mm]
  oval 1.5x1.45 hole 0.95: 1(-2.54,1.265) 3(2.54,1.265) 4(2.54,-1.275) 5(0,-1.275) 6(-2.54,-1.275)
  rrect50% 1.5x1.45 hole 0.95: 2(0,1.265)
FSM-SWITCH-6X6X5.5 [mm]
  rrect10% 1.5x0.85 smd: 1(-4.2,-2.25) 1(4.2,-2.25) 2(-4.2,2.25) 2(4.2,2.25)
  silkscreen extent -2.97,-3 3.03,3, body extent -4.5,-3.05 4.5,3.05, height 5.5
FSM-SWITCH-6X6X7.0 [mm]
  rrect10% 1.5x0.85 smd: 1(-4.2,-2.25) 1(4.2,-2.25) 2(-4.2,2.25) 2(4.2,2.25)
  silkscreen extent -2.97,-3 3.03,3, body extent -4.5,-3.05 4.5,3.05, height 7
LED_0402 [mm]
  rrect10% 0.3x0.55 smd: 1(-0.4,0) 2(0.4,0)
  body extent -0.51,-0.25 0.5,0.25, height 0.45
"RES 0402_1005 RF" [mm] "Chip Resistor, 2-Leads, Body 1.0x0.5mm, IPC High Density"
  rrect10% 0.5x0.55 smd: 1(-0.5,0) 2(0.5,0)
  silkscreen extent -0.9,-0.43 0.9,0.43, body extent -0.5,-0.25 0.5,0.25, height 0.35
SODFL250X100-2L [mm] "SODFL, 2-Leads, Body 1.25x2.50mm, IPC High Density"
  rrect1% 0.7x0.4 smd: A(-1.1,0) K(1.1,0)
  silkscreen extent -0.9,-0.7 1.45,0.7, body extent -1.25,-0.67 1.25,0.67, height 1
SOT95P230X110-3L [mm] "SOT23, 3-Leads, Body 2.90x2.30mm, Pitch 0.95mm, IPC High Density"
  rrect1% 0.7x0.55 smd: D(1.05,0) G(-1.05,0.95) S(-1.05,-0.95)
  silkscreen extent -0.7,-1.5 0.7,1.5, body extent -1.3,-1.5 1.3,1.5, height 1.1
SOT223_LDO [mm] "SOT223, 4-Leads, Body 6.50x7.00mm (avg), Pitch 2.30mm, IPC Medium Density"
  rrect10% 2.15x1 smd: 1(-2.925,2.3) 2(-2.925,0) 3(-2.925,-2.3)
  rrect10% 2.15x3.25 smd: 2(2.925,0)
  silkscreen extent -3.05,-3.35 1.85,3.35, body extent -3.5,-3.35 3.5,3.35, height 1.8
TSSOP24 [mm] "TSOP, 24-Leads, Body 7.80x4.40mm, Pitch 0.65mm, Thermal Pad 3.42x2.44mm, IPC Medium Density"
  oval 0.325x1.2 smd: 1(-3.575,-2.95) 2(-2.925,-2.95) 3(-2.275,-2.95) 4(-1.625,-2.95) 5(-0.975,-2.95) 6(-0.325,-2.95) 7(0.325,-2.95) 8(0.975,-2.95) 9(1.625,-2.95) 10(2.275,-2.95) 11(2.925,-2.95) 12(3.575,-2.95) 13(3.575,2.95) 14(2.925,2.95) 15(2.275,2.95) 16(1.625,2.95) 17(0.975,2.95) 18(0.325,2.95) 19(-0.325,2.95) 20(-0.975,2.95) 21(-1.625,2.95) 22(-2.275,2.95) 23(-2.925,2.95) 24(-3.575,2.95)
  rect 3.42x2.2 smd: 25(0,0)
  silkscreen extent -4.45,-3.08 3.95,1.85, body extent -3.95,-3.2 3.95,3.2, height 1.2
TVS_DIODE [mm] "SODFL 98x40 2 pin"
  rrect1% 0.4x0.4 smd: A(-0.453,0.001) K(0.447,0.001)
  silkscreen extent -0.5,-0.4 0.75,0.55, body extent -0.49,-0.32 0.48,0.33, height 0.4
USB-C-TH_GT-USB-7055BB [mm] "USB  C vertical connector"
  rrect10% 0.35x0.85 smd mask+0: A1(-2.75,0.9) A12(2.75,0.9) B1(2.75,-0.9) B12(-2.75,-0.9)
  rrect10% 0.25x0.85 smd mask+0: A4(-1.25,0.9) A9(1.25,0.9) B4(1.25,-0.9) B9(-1.25,-0.9)
  rrect10% 0.24x0.85 smd mask+0: A5(-0.75,0.9) A6(-0.25,0.9) A7(0.25,0.9) A8(0.75,0.9) B5(0.75,-0.9) B6(0.25,-0.9) B7(-0.25,-0.9) B8(-0.75,-0.9)
  round 0.325 hole 0.6 unplated mask+0: H(-3.75,0) H(3.75,0)
  oval 1.6x1.1 hole 0.5 slot 1 at 0 deg mask+0: M(-2.4,-2.125) M(-2.4,2.15) M(2.4,-2.125) M(2.4,2.125)
  silkscreen extent -4.5,-1.6 4.5,1.6, body extent -4.47,-2.3 4.47,2.3, height 6.55
XCVR_ESP32-S3-WROOM-1-N16R2 [mm]
  rrect50% 1.5x0.9 smd: 2(-8.75,3.99) 3(-8.75,2.72) 4(-8.75,1.45) 5(-8.75,0.18) 6(-8.75,-1.09) 7(-8.75,-2.36) 8(-8.75,-3.63) 9(-8.75,-4.9) 10(-8.75,-6.17) 11(-8.75,-7.44) 12(-8.75,-8.71) 13(-8.75,-9.98) 14(-8.75,-11.25) 27(8.75,-11.25) 28(8.75,-9.98) 29(8.75,-8.71) 30(8.75,-7.44) 31(8.75,-6.17) 32(8.75,-4.9) 33(8.75,-3.63) 34(8.75,-2.36) 35(8.75,-1.09) 36(8.75,0.18) 37(8.75,1.45) 38(8.75,2.72) 39(8.75,3.99) GND(-8.75,5.26) GND(8.75,5.26)
  rrect50% 0.9x1.5 smd: 15(-6.985,-12.5) 16(-5.715,-12.5) 17(-4.445,-12.5) 18(-3.175,-12.5) 19(-1.905,-12.5) 20(-0.635,-12.5) 21(0.635,-12.5) 22(1.905,-12.5) 23(3.175,-12.5) 24(4.445,-12.5) 25(5.715,-12.5) 26(6.985,-12.5)
  round 0.56 hole 0.3 mask+0: GND(-3.6,-3.86) GND(-3.6,-2.46) GND(-3.6,-1.06) GND(-2.9,-4.56) GND(-2.9,-3.16) GND(-2.9,-1.76) GND(-2.9,-0.36) GND(-2.2,-3.86) GND(-2.2,-2.46) GND(-2.2,-1.06) GND(-1.5,-4.56) GND(-1.5,-3.16) GND(-1.5,-1.76) GND(-1.5,-0.36) GND(-0.8,-3.86) GND(-0.8,-2.46) GND(-0.8,-1.06) GND(-0.1,-4.56) GND(-0.1,-3.16) GND(-0.1,-1.76) GND(-0.1,-0.36) GND(0.6,-3.86) GND(0.6,-2.46) GND(0.6,-1.06)
  rect 0.9x0.9 smd mask+0: GND(-2.9,-3.86) GND(-2.9,-2.46) GND(-2.9,-1.06) GND(-1.5,-3.86) GND(-1.5,-2.46) GND(-1.5,-1.06) GND(-0.1,-3.86) GND(-0.1,-2.46) GND(-0.1,-1.06)
  Keep-Out Layer region: 9,6.75 -9,6.75 -9,12.75 9,12.75
  Keep-Out Layer region: 9,6.75 -9,6.75 -9,12.75 9,12.75
  silkscreen extent -10.3,-12.75 9,12.75, body extent -9,-12.75 9,12.75, height 3.25

## Part data
BOOT SW1 SW2 SW3 SW4: "5.2x5.2x1.2mm Tactile Switch", JLCPCB=C722968
BUZZER: JLCPCB=C95299
C1 C4 C23: library part CAP_0603_100nF, "Ceramic capacitor 0603", JLCPCB=C7501158
C2: library part CAP_0402_100nF, "Ceramic capacitor 0402", JLCPCB=C7501158
C3 C22 C24 C25: library part CAP_1206_1uF, "Ceramic capacitor 1206", JLCPCB=C5448921
C5 C6 C7 C8 C9 C10 C11 C12 C13 C14 C15 C16 C17 C18 C19 C20: library part CAP_0402_100pF, "Ceramic capacitor 0402", JLCPCB=C1546
C21_D1 C21_D2 C21_D3 C21_D4 C21_D5 C21_D6 C21_D7 C21_D8: library part CAP_0402_100nF, "Ceramic capacitor 0402", JLCPCB=????
D1 D2 D3 D4 D5 D6 D7 D8 D9 D10 D11 D12 D13 D14 D15 D16 D17 D18 D19 D20 D21 D22 D23 D24 D25 D26 D27 D28 D29 D30 D31 D32 D33 D34 D35 D36 D37 D38 D39 D40 D41 D42 D43 D44 D45 D46 D47 D48 D49 D50 D51 D52 D53 D54 D55 D56 D57 D58 D59 D60 D61 D62 D63 D64 D65 D66 D67 D68 D69 D70 D71 D72 D73 D74 D75 D76 D77 D78 D79 D80 D81 D82 D83 D84 D85 D86 D87 D88 D89 D90 D91 D92 D93 D94 D95 D96 D97 D98 D99 D100 D101 D102 D103 D104 D105 D106 D107 D108 D109 D110 D111 D112 D113 D114 D115 D116 D117 D118 D119 D120 D121 D122 D123 D124 D125 D126 D127 D128 D129 D130 D131 D132 D133 D134 D135 D136 D137 D138 D139 D140 D141 D142 D143 D144 D145 D146 D147 D148 D149 D150 D151 D152 D153 D154 D155 D156 D157 D158 D159 D160 D161 D162 D163 D164 D165 D166 D167 D168 D169 D170 D171 D172 D173 D174 D175 D176 D177 D178 D179 D180 D181 D182 D183 D184 D185 D186 D187 D188 D189 D190 D191 D192 D193 D194 D195 D196 D197 D198 D199 D200 D201 D202 D203 D204 D205 D206 D207 D208 D209 D210 D211 D212 D213 D214 D215 D216 D217 D218 D219 D220 D221 D222 D223 D224 D225 D226 D227 D228 D229 D230 D231 D232 D233 D234 D235 D236 D237 D238 D239 D240 D241 D242 D243 D244 D245 D246 D247 D248 D249 D250 D251 D252 D253 D254 D255 D256: "Red 0402 SMD LED", JLCPCB=C25503345
  D1 D2 D3 D4 D5 D6 D7 D8 D9 D10 D11 D12 D13 D17 D18 D19 D20 D21 D22 D23 D24 D25 D26 D27 D28 D29 D33 D34 D35 D36 D37 D38 D39 D40 D41 D42 D43 D44 D45 D49 D50 D51 D52 D53 D54 D55 D56 D57 D58 D59 D60 D61 D65 D66 D67 D68 D69 D70 D71 D72 D73 D74 D75 D76 D77 D81 D82 D83 D84 D85 D86 D87 D88 D89 D90 D91 D92 D93 D97 D98 D99 D100 D101 D102 D103 D104 D105 D106 D107 D108 D109 D113 D114 D115 D116 D117 D118 D119 D120 D121 D122 D123 D124 D125 D129 D130 D131 D132 D133 D134 D135 D136 D137 D138 D139 D140 D141 D145 D146 D147 D148 D149 D150 D151 D152 D153 D154 D155 D156 D157 D161 D162 D163 D164 D165 D166 D167 D168 D169 D170 D171 D172 D173 D177 D178 D179 D180 D181 D182 D183 D184 D185 D186 D187 D188 D189 D193 D194 D195 D196 D197 D198 D199 D200 D201 D202 D203 D204 D205 D209 D210 D211 D212 D213 D214 D215 D216 D217 D218 D219 D220 D221: ClassName=LED_MATRIX
D257: "Schottky Diode 20v 500mA", JLCPCB=C27636123
D258 D259: "TVS Diode", JLCPCB=C151980
LDO_3v3: "3.3V LDO", JLCPCB=C18906017
LED_Driver: library part TLC5948, "16 Channel CC Led Driver", JLCPCB=C702084
Q1: "P channel mosfet 1.2A", JLCPCB=C3015220
R1 R2 R5: library part RES_0402_22k, "Chip Resistor", JLCPCB=C2906913
R3: library part RES_0402_68k, "Chip Resistor", JLCPCB=C3017593
R4 R38: library part RES_0402_1.5k, "Chip Resistor", JLCPCB=C2933074
R17 R18: library part RES_0402_5.1k, "Chip Resistor", JLCPCB=C2906948
RESET: "5.2x5.2x1.2mm Tactile Switch", JLCPCB=C722967
S_D1 S_D2 S_D3 S_D4 S_D5 S_D6 S_D7 S_D8: JLCPCB=C22447132
U1: library part PHOTOTRANSISTOR
USB: "USB Connector, vertical", JLCPCB=C7450621
WiFi_Module: "ESP32 Module, 4MB Flash, No PSRAM", JLCPCB=C2913197

## Free pads (board coordinates)
  oval 0.6x1 smd far side mask+0: 2(5.301,56.378) 2(6.952,41.849) 2(10.095,62.213) 2(11.629,43.097) 2(11.935,60.09) 2(30.011,19.13) 2(31.137,19.13) 2(32.42,19.13) 2(33.59,19.13) 2(34.923,19.13) 2(35.998,19.13) 2(49.283,40.933) 2(49.46,58.248) 2(52.231,41.277) 2(52.583,19.098) 2(53.87,58.396)
  oval 1x0.6 smd far side mask+0: 2(5.995,47.667) 2(6.067,51.766) 2(6.81,55.597) 2(53.798,53.874)
  oval 1x0.6 smd far side rot 135 mask+0: 2(22.217,2.507) 2(23.879,2.946) 2(25.443,3.557) 2(26.718,4.457) 2(29.691,6.153) 2(31.191,6.166) 2(39.382,19.674) 2(40.872,19.674) 2(42.363,19.674) 2(43.853,19.674) 2(45.343,19.674) 2(46.833,19.674) 2(48.323,19.674) 2(54.274,45.303) 2(54.45,48.8)
  oval 1x0.6 smd far side rot 45 mask+0: 2(54.63,50.521)
  round 1.5 hole 0.9 mask+0: 3(28.708,4.932) 4(43.52,2.172) 5(52.046,25.814) 5(58.75,33.125) 6(1.3,36.225) 9(49.834,77.997) 10(58.475,65.45) 11(1.375,61.325) 11(9.155,79.071)
  round 1.5 smd far side paste-10: 5(8.585,42.037) 5(41.516,43.077) 7(14.703,58.613) 8(46.025,61.5)
  round 6 hole 6 unplated mask+0: M(5,5) M(5,75) M(55,5) M(55,75)

## Via types
v1: diameter 0.7, hole 0.3, TL to BL, tented both sides, 689 vias
v2: diameter 0.7, hole 0.3, TL to BL, tented top, 6 vias
v3: diameter 1.5, hole 0.9, TL to BL, 3 vias

## Nets (pads, with @x,y where several pads share a name; then routed paths per layer and width w, separated by ;. In a path a pad name is that pad's centre, name@x,y a point inside that pad or via, vN(x,y) a via of type N, cw(c..) or ccw(c..) an arc to the next point about the centre after c; other vN are vias at no path point)
+5: BUZZER.1 C21_D1.1 C21_D2.1 C21_D3.1 C21_D4.1 C21_D5.1 C21_D6.1 C21_D7.1 C21_D8.1 C22.1 C23.1 C24.2 D257.K LDO_3v3.3 S_D1.1 S_D1.7 S_D1.8 S_D2.1 S_D2.7 S_D2.8 S_D3.1 S_D3.7 S_D3.8 S_D4.1 S_D4.7 S_D4.8 S_D5.1 S_D5.7 S_D5.8 S_D6.1 S_D6.7 S_D6.8 S_D7.1 S_D7.7 S_D7.8 S_D8.1 S_D8.7 S_D8.8 USB.A4 USB.A9 USB.B4 USB.B9 | length 140.7
  TL w0.25: v1(10.482,46.126) 11.653,46.126 ; v1(10.482,50.409) 11.653,50.409 ; v1(10.482,54.813) 11.653,54.813 ; v1@10.481,59.134 11.653,57.961 ; v1@12.821,59.129 11.653,57.961 ; v1(50.393,42.332) 49.255,43.469 ; v1(50.393,46.615) 49.255,46.615 ; v1(50.393,55.34) 49.255,54.202 49.255,51.019 ; v1(50.444,51.019) 49.255,51.019 ; 11.653,46.126 11.653,44.886 16.302,40.238 v1(16.31,40.238) 27.766,40.238 v1(30,38.004) 31.726,39.73 45.516,39.73 49.255,43.469 ; 11.653,46.126 11.653,50.409 ; 11.653,50.409 11.653,54.813 ; 11.653,54.813 11.653,57.961 ; 49.255,43.469 49.255,46.615 ; 49.255,46.615 49.255,51.019
  BL w0.102: S_D4.7@8.632,45.054 S_D4.8@8.632,45.554 ; S_D3.7@8.632,49.337 S_D3.8@8.632,49.837 ; S_D2.7@8.632,53.742 S_D2.8@8.632,54.242 ; S_D1.7@8.632,58.062 S_D1.8@8.632,58.562 ; S_D5.8@52.243,42.903 S_D5.7@52.243,43.403 ; S_D6.8@52.243,47.186 S_D6.7@52.243,47.686 ; S_D7.8@52.243,51.591 S_D7.7@52.243,52.091 ; S_D8.8@52.243,55.911 S_D8.7@52.243,56.411
  BL w0.25: C21_D7.1@7.112,54.585 7.112,54.61 7.316,54.813 8.632,54.813 ; C21_D2.1@7.831,50.519 7.942,50.409 8.632,50.409 ; C21_D1.1@8.304,46.395 8.304,46.37 8.549,46.126 8.632,46.126 ; S_D4.8@8.632,45.554 8.632,46.126 ; S_D3.8@8.632,49.837 8.632,50.409 ; S_D2.8@8.632,54.242 8.632,54.813 ; S_D1.8@8.632,58.562 8.732,58.562 9.304,59.134 v1(10.482,59.134) C21_D6.1@10.482,60.028 ; S_D4.1@10.482,45.554 v1@10.482,46.04 ; v1(10.482,46.126) 8.632,46.126 ; S_D3.1@10.482,49.837 v1@10.482,50.322 ; v1(10.482,50.409) 8.632,50.409 ; S_D2.1@10.482,54.242 v1@10.482,54.727 ; v1(10.482,54.813) 8.632,54.813 ; S_D1.1@10.482,58.562 v1@10.482,59.047 ; v1(12.825,59.125) 15.95,62.25 C23.1@15.95,63.55 15.95,64.315 16.251,64.616 D257.K@16.251,65.188 16.251,67.093 C22.1@16.326,67.168 16.326,68.932 17.413,70.019 17.413,70.988 BUZZER.1@18.1,71.675 ; LDO_3v3.3@13.871,37.951 C24.2@13.871,40.238 v1(16.31,40.238) ; USB.B4@28.75,34.822 USB.A9@28.75,36.622 28.75,37.259 29.485,37.994 30.515,37.994 30.518,37.996 31.25,37.264 USB.A4@31.25,36.622 USB.B9@31.25,34.822 ; S_D5.1@50.393,42.903 v1(50.393,42.332) ; S_D6.1@50.393,47.186 v1(50.393,46.615) 52.243,46.615 ; S_D7.1@50.393,51.591 50.418,51.591 50.418,51.045 v1(50.444,51.019) 52.23,51.019 ; S_D8.1@50.393,55.911 v1(50.393,55.34) 51.262,55.34 51.362,55.239 52.243,55.239 ; C21_D3.1@50.901,41.224 50.776,41.349 50.75,41.349 50.393,41.707 v1(50.393,42.332) ; S_D5.8@52.243,42.903 52.143,42.903 51.571,42.332 v1(50.393,42.332) ; S_D6.8@52.243,47.186 52.243,46.615 ; S_D7.8@52.243,51.591 52.23,51.591 52.23,51.019 ; S_D8.8@52.243,55.911 52.243,55.239 ; C21_D5.1@52.474,50.75 52.474,50.775 52.23,51.019 ; C21_D4.1@53.044,55.239 52.243,55.239 ; C21_D8.1@53.145,46.558 53.088,46.615 52.243,46.615
A0: D1.2 D2.2 D3.2 D4.2 D5.2 D6.2 D7.2 D8.2 D9.2 D10.2 D11.2 D12.2 D13.2 D14.2 D15.2 D16.2 pad.2@10.095,62.213 S_D1.3 | length 48.7
  TL w0.127: D14.2@7.921,65.547 8.038,65.566 8.367,65.331 8.682,65.331 9.75,66.398 9.75,66.943 10.14,67.333 ; D15.2@9.667,67.769 9.704,67.769 10.112,67.361 10.598,66.875 v1(10.625,66.875) ; D16.2@11.636,69.797 11.771,68.645 11.77,68.578 v1(11.77,67.96) ; v1(12.675,53.6) D1.2@13.334,53.6 14,53.388 D2.2@14.667,53.6 15.334,53.388 D3.2@16,53.6 16.667,53.388 D4.2@17.334,53.6 18,53.388 D5.2@18.667,53.6 19.334,53.388 D6.2@20,53.6 20.667,53.388 D7.2@21.334,53.6 22,53.388 D8.2@22.667,53.6 23.334,53.388 D9.2@24,53.6 24.667,53.388 D10.2@25.333,53.6 26,53.388 D11.2@26.667,53.6 27.333,53.388 D12.2@28,53.6 28.667,53.388 D13.2@29.333,53.6
  BL w0.127: S_D1.3@10.507,57.562 11.488,57.562 12.061,56.989 12.061,56.298 ; v1(10.625,66.875) 11.25,66.25 ; v1(11.77,67.96) 11.77,66.77 11.25,66.25 ; v1(12.675,53.6) 12.675,53.608 12.061,54.222 12.061,56.298 ; 11.25,66.25 11.25,63.568 10.095,62.413 pad.2@10.095,62.213 10.095,61.974 6.897,58.777 6.897,57.123 7.722,56.298 12.061,56.298